# Altium PCB ISO-ASS[3]-VB-RC1.PcbDoc (part 3 of 3)
Units mm, origin at the board's own origin, x right, y up, seen from the top; angles counter-clockwise.
Board outline 300 x 85 mm, 4 copper layers (Top Layer, MidLayer1, MidLayer2, Bottom Layer); 157 components, 49 nets, 745 pads, 270 vias.
Unrouted connection lines stored in the file: 15.
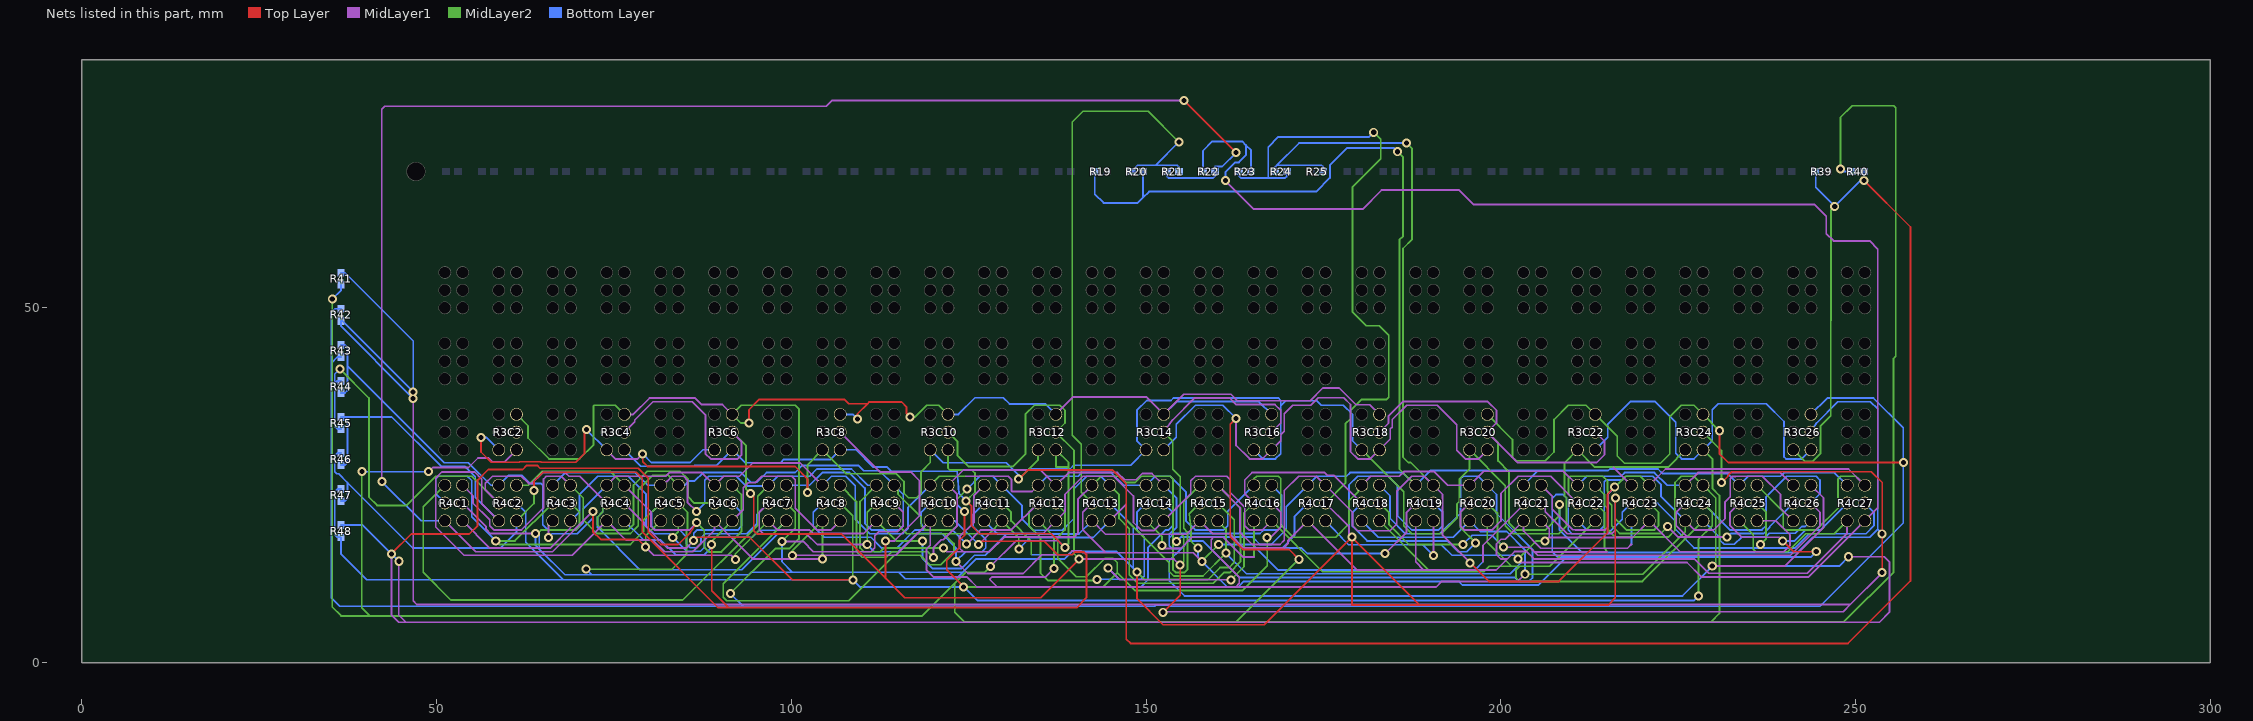
[diagram p5: the nets of this part, all layers, seen from the top]

## Via types
v1: diameter 1.27, hole 0.711, Top Layer to Bottom Layer, 270 vias

## Nets (pads, with @x,y where several pads share a name; then routed paths per layer and width w, separated by ;. In a path a pad name is that pad's centre, name@x,y a point inside that pad or via, vN(x,y) a via of type N, cw(c..) or ccw(c..) an arc to the next point about the centre after c; other vN are vias at no path point) (continued)
NetR3C2_3: R3C2.3 R3C4.3 R3C6.3 R3C8.3 R3C10.3 R3C12.3 R3C14.3 R3C16.3 R3C18.3 R3C20.3 R3C22.3 R3C24.3 R3C26.3 R39.1 R40.2 | length 556.8
  Top Layer w0.254: v1(56.286,31.752) 56.286,29.693 57.734,28.245 61.665,28.245 61.733,28.313 64.713,28.313 64.781,28.245 69.647,28.245 70.866,29.464 70.866,32.614 v1(71.145,32.893) ; v1(79.07,29.439) 79.07,28.346 79.756,27.661 100.533,27.661 102.311,25.883 v1(102.311,23.978) ; v1(132.055,25.883) 133.325,27.153 145.288,27.153 147.218,25.222 147.218,3.327 147.828,2.718 248.92,2.718 257.734,11.532 257.734,61.404 v1(251.167,67.97)
  MidLayer1 w0.254: R3C4.3@74,30 75.298,28.702 78.334,28.702 v1(79.07,29.439)
  MidLayer2 w0.254: v1(102.311,23.978) 102.311,27.911 R3C8.3@104.4,30 107.781,26.619 114.808,26.619 115.9,25.527 115.9,23.876 116.535,23.241 117.678,23.241 118.313,23.876 118.313,26.924 119.6,28.211 R3C10.3@119.6,30 ; v1(132.055,25.883) 134.8,28.628 R3C12.3@134.8,30 ; R3C18.3@180.4,30 186.334,24.066 186.334,19.304 187.452,18.186 191.618,18.186 193.811,20.38 193.811,22.368 194.158,22.714 194.158,25.87 195.6,27.312 R3C20.3@195.6,30 200.635,24.965 200.635,19.304 201.752,18.186 208.153,18.186 209.271,19.304 209.271,23.216 208.991,23.495 208.991,28.191 R3C22.3@210.8,30 213.225,27.575 223.575,27.575 R3C24.3@226,30 ; R3C26.3@241.2,30 242.803,28.397 243.97,28.397 245.037,29.464 245.037,33.325 246.503,34.791 246.503,48.182 246.507,48.186 246.507,63.766 v1(247.054,64.313)
  Bottom Layer w0.254: v1(56.286,31.752) 57.048,31.752 R3C2.3@58.8,30 ; v1(71.145,32.893) 71.145,32.855 R3C4.3@74,30 ; v1(79.07,29.439) 80.298,28.211 85.785,28.211 87.574,30 R3C6.3@89.2,30 ; R3C10.3@119.6,30 121.431,28.169 130.302,28.169 132.055,26.416 v1(132.055,25.883) 133.477,27.305 139.294,27.305 139.827,27.838 147.838,27.838 R3C14.3@150,30 148.717,31.283 148.717,35.56 150.114,36.957 153.518,36.957 153.873,37.313 168.625,37.313 168.981,36.957 168.981,36.223 ; R3C16.3@165.2,30 166.481,28.719 168.241,28.719 168.981,29.459 ; R3C18.3@180.4,30 179.095,31.305 179.095,35.001 177.8,36.297 174.684,36.297 174.066,36.914 169.672,36.914 168.981,36.223 ; R39.1@244.387,69.215 244.387,66.98 v1(247.054,64.313) 250.939,68.198 v1@251.167,68.426 ; v1(251.167,67.97) v1@251.167,68.426 ; 168.981,29.459 168.981,36.223 ; 168.981,29.459 168.981,36.223 ; v1@251.167,68.426 R40.2@251.167,69.215 v1@251.167,68.426
NetR3C2_4: R3C2.4 R3C4.4 R3C6.4 R3C8.4 R3C10.4 R3C12.4 R3C14.4 R3C16.4 R3C18.4 R3C20.4 R3C22.4 R3C24.4 R3C26.4 R42.1 R43.2 | length 690.2
  Top Layer w0.254: v1(94.056,33.782) 94.056,35.662 95.504,37.109 107.493,37.109 108.102,36.5 110.769,36.5 ; v1(109.322,34.366) 109.322,35.052 110.769,36.5 ; v1(116.738,34.62) 116.23,35.128 116.23,36.068 115.545,36.754 111.023,36.754 ; v1(230.81,32.69) 230.81,29.464 232.054,28.219 v1(256.718,28.219) ; 110.769,36.5 111.023,36.754 ; 110.769,36.5 111.023,36.754
  MidLayer1 w0.254: R3C4.4@76.5,35 77.738,35 80.035,37.297 86.462,37.297 87.386,36.373 90.327,36.373 R3C6.4@91.7,35 ; R3C12.4@137.3,35 139.765,37.465 150.035,37.465 R3C14.4@152.5,35 155.321,37.821 161.975,37.821 162.864,36.932 173.119,36.932 174.907,38.719 177.225,38.719 179.596,36.347 181.553,36.347 R3C18.4@182.9,35
  MidLayer2 w0.254: R3C2.4@61.3,35 62.916,33.384 62.916,31.673 65.869,28.719 70.172,28.719 72.161,30.709 72.161,36.195 72.263,36.297 75.203,36.297 R3C4.4@76.5,35 ; v1(91.44,9.754) 97.765,16.078 99.72,16.078 101.092,17.45 101.092,35.773 100.584,36.281 92.981,36.281 R3C6.4@91.7,35 92.918,33.782 v1(94.056,33.782) ; v1(116.738,34.62) 117.409,34.62 119.085,36.297 120.803,36.297 R3C10.4@122.1,35 ; R3C20.4@198.1,35 201.651,31.449 201.651,28.987 202.184,28.453 206.248,28.453 207.489,29.694 207.489,34.261 209.525,36.297 212.003,36.297 R3C22.4@213.3,35 216.408,31.892 216.408,29.134 217.424,28.118 222.504,28.118 223.799,29.413 223.799,34.64 225.44,36.281 227.219,36.281 R3C24.4@228.5,35 v1(230.81,32.69)
  Bottom Layer w0.254: R43.2@36.576,43.092 36.068,43.092 35.179,42.203 ; R42.1@36.576,49.872 35.775,49.872 35.179,49.276 35.179,42.203 ; v1(91.44,9.754) 93.243,7.95 ; R3C8.4@106.9,35 108.688,35 v1(109.322,34.366) ; R3C10.4@122.1,35 123.57,35 125.908,37.338 129.904,37.338 130.768,36.474 135.826,36.474 R3C12.4@137.3,35 ; R3C14.4@152.5,35 154.305,36.805 165.895,36.805 R3C16.4@167.7,35 ; R3C26.4@243.7,35 245.997,37.297 252.517,37.297 256.718,33.096 v1(256.718,28.219) 256.718,19.686 244.982,7.95 153.444,7.95 153.248,8.146 151.412,8.146 151.216,7.95 ; 35.179,9.144 35.179,42.203 ; 35.179,9.144 35.179,42.203 ; 35.179,9.144 36.373,7.95 93.243,7.95 ; 93.243,7.95 151.216,7.95 ; 93.243,7.95 151.216,7.95
NetR3C2_5: R3C2.5 R3C4.5 R3C6.5 R3C8.5 R3C10.5 R3C12.5 R3C14.5 R3C16.5 R3C18.5 R3C20.5 R3C22.5 R3C24.5 R3C26.5 R41.1 R42.2 | length 867.5
  Top Layer w0.254: v1(94.259,23.851) 94.717,23.393 94.717,18.618 95.174,18.161 107.036,18.161 113.309,11.887 ; v1(113.309,17.17) 113.309,11.887 ; v1(140.589,14.605) 135.153,9.169 116.027,9.169 ; v1(152.425,7.112) 154.813,9.5 v1(154.813,13.741) ; v1(231.089,25.375) 232.029,26.314 232.029,26.416 232.537,26.924 252.222,26.924 253.746,25.4 v1(253.746,18.173) ; 113.309,11.887 116.027,9.169 ; 113.309,11.887 116.027,9.169 ; v1(253.746,18.173) v1(253.746,12.7) v1(253.746,18.173)
  MidLayer1 w0.254: v1(46.736,38.176) v1(46.736,37.262) ; R3C4.5@76.5,32.5 77.953,33.953 77.953,34.21 80.532,36.789 86.088,36.789 87.919,34.959 87.919,29.464 88.664,28.719 92.456,28.719 92.981,29.244 92.981,31.219 R3C6.5@91.7,32.5 ; R3C8.5@106.9,32.5 112.501,26.899 116.84,26.899 118.085,25.654 118.085,20.701 114.554,17.17 v1(113.309,17.17) ; v1(140.589,14.605) 153.949,14.605 v1(154.813,13.741) ; v1(152.425,7.112) 152.502,7.188 248.234,7.188 249.25,8.204 ; R3C14.5@152.5,32.5 153.731,34.189 156.854,37.313 161.765,37.313 162.705,36.373 168.173,36.373 168.986,35.56 168.986,33.786 R3C16.5@167.7,32.5 ; R3C18.5@182.9,32.5 184.181,33.781 184.181,34.778 186.207,36.805 198.145,36.805 199.39,35.56 199.39,33.79 R3C20.5@198.1,32.5 202.405,28.195 213.481,28.195 214.605,29.319 214.605,31.195 R3C22.5@213.3,32.5 ; 46.736,8.712 v1(46.736,37.262) ; 46.736,8.712 47.244,8.204 249.25,8.204 ; 46.736,8.712 v1(46.736,37.262) ; 249.25,8.204 v1(253.746,12.7) 249.25,8.204
  MidLayer2 w0.254: R3C6.5@91.7,32.5 93.65,30.55 93.65,24.46 v1(94.259,23.851) ; R3C10.5@122.1,32.5 123.419,31.181 123.419,29.21 124.968,27.661 131.274,27.661 133.011,29.397 133.011,35.023 134.285,36.297 137.846,36.297 138.582,35.56 138.582,33.782 R3C12.5@137.3,32.5 139.852,29.948 139.852,15.342 v1(140.589,14.605) ; R3C14.5@152.5,32.5 153.781,31.219 153.781,27.254 154.813,26.222 154.813,18.237 155.321,17.729 155.321,14.249 v1(154.813,13.741) ; R3C20.5@198.1,32.5 199.619,30.981 199.619,28.448 201.143,26.924 201.143,19.736 202.184,18.694 206.248,18.694 208.255,20.701 v1(208.255,22.301) ; R3C24.5@228.5,32.5 231.089,29.911 v1(231.089,25.375)
  Bottom Layer w0.254: R41.1@36.576,54.952 37.123,54.952 46.736,45.339 v1(46.736,38.176) 36.74,48.172 R42.2@36.576,48.172 36.576,47.422 46.279,37.719 v1(46.736,37.262) ; v1(208.255,22.301) 208.255,18.746 211.482,15.519 241.783,15.519 243.942,17.678 251.982,17.678 253.111,18.808 ; R3C26.5@243.7,32.5 244.485,33.77 247.503,36.789 252.085,36.789 253.111,35.763 253.111,18.808 ; v1(253.746,18.173) 253.111,18.808
NetR3C2_6: R3C2.6 R3C4.6 R3C6.6 R3C8.6 R3C10.6 R3C12.6 R3C14.6 R3C16.6 R3C18.6 R3C20.6 R3C22.6 R3C24.6 R3C26.6 R40.1 R41.2 | length 957.6
  Top Layer w0.254: v1(124.663,22.809) 125.425,22.047 125.425,19.304 126.543,18.186 136.627,18.186 v1(138.582,16.231) ; v1(162.687,34.442) 161.874,33.63 161.874,17.729 163.627,15.977 170.155,15.977 v1(171.552,14.58)
  MidLayer1 w0.254: v1(48.895,26.924) 49.479,27.508 54.527,27.508 55.873,28.854 57.379,28.854 57.963,28.27 59.57,28.27 R3C2.6@61.3,30 ; v1(128.092,13.589) 131.698,17.195 137.618,17.195 v1(138.582,16.231) ; v1(162.687,34.442) 162.687,30.624 164.592,28.719 166.419,28.719 R3C16.6@167.7,30 168.986,31.286 168.986,32.106 169.494,32.614 169.494,35.103 170.688,36.297 173.203,36.297 174.249,37.343 177.864,37.343 178.816,36.391 178.816,29.735 179.832,28.719 181.619,28.719 R3C18.6@182.9,30 184.429,31.529 184.429,32.951 184.689,33.211 184.689,34.27 186.715,36.297 191.059,36.297 193.802,33.553 193.802,29.972 195.072,28.702 196.802,28.702 R3C20.6@198.1,30
  MidLayer2 w0.254: v1(35.331,51.257) 35.331,7.849 36.576,6.604 40.64,6.604 ; v1(39.497,26.924) 39.497,7.747 40.64,6.604 ; R3C10.6@122.1,30 122.1,27.432 122.379,27.153 125.476,27.153 125.908,26.721 125.908,24.054 v1(124.663,22.809) ; v1(128.092,13.589) 127.254,12.751 124.612,12.751 ; v1(138.582,16.231) 139.089,16.737 ; v1(171.552,14.58) 162.738,5.766 ; R3C24.6@228.5,30 229.845,28.655 229.845,24.536 230.81,23.571 230.81,6.934 229.641,5.766 ; v1(247.853,69.596) 247.853,76.835 249.504,78.486 255.397,78.486 255.651,78.232 255.651,43.18 255.346,42.875 255.346,12.776 248.336,5.766 229.641,5.766 ; 40.64,6.604 118.466,6.604 ; 40.64,6.604 118.466,6.604 ; 118.466,6.604 123.038,11.176 ; 123.038,11.176 123.038,7.112 124.384,5.766 ; 123.038,11.176 124.612,12.751 ; 123.038,11.176 124.612,12.751 ; 124.384,5.766 162.738,5.766 ; 124.384,5.766 162.738,5.766 ; 124.384,5.766 162.738,5.766 ; 139.089,16.737 139.089,27.571 ; 139.089,16.737 139.089,27.571 ; 139.089,27.571 137.3,27.571 R3C12.6@137.3,30 139.089,28.211 139.089,27.571 ; 162.738,5.766 229.641,5.766 ; 162.738,5.766 229.641,5.766
  Bottom Layer w0.254: v1(35.331,51.257) 36.576,52.502 R41.2@36.576,53.252 ; v1(39.497,26.924) v1(48.895,26.924) ; R3C4.6@76.5,30 78.814,27.686 86.276,27.686 86.395,27.805 89.505,27.805 R3C6.6@91.7,30 93.506,28.194 98.501,28.194 98.958,28.651 105.551,28.651 R3C8.6@106.9,30 109.13,30 111.565,27.566 113.523,27.566 114.114,26.975 123.393,26.975 123.667,23.805 v1(124.663,22.809) ; R3C14.6@152.5,30 154.254,31.754 154.254,33.579 156.972,36.297 160.833,36.297 v1(162.687,34.442) ; R3C22.6@213.3,30 215.062,31.762 215.062,33.63 218.237,36.805 221.767,36.805 224.663,33.909 224.663,29.525 225.469,28.719 227.219,28.719 R3C24.6@228.5,30 229.781,31.281 229.781,35.659 230.621,36.499 237.397,36.499 239.903,33.992 239.903,29.007 240.191,28.719 242.419,28.719 R3C26.6@243.7,30 ; v1(247.853,69.596) 248.234,69.215 R40.1@249.467,69.215
NetR4C1_1: R4C1.1 R4C3.1 R4C5.1 R4C7.1 R4C9.1 R4C11.1 R4C13.1 R4C15.1 R4C17.1 R4C19.1 R4C21.1 R4C23.1 R4C25.1 R4C27.1 R19.1 R20.1 | length 472.7
  MidLayer1 w0.254: R4C5.1@81.6,25 82.448,25.527 83.202,26.281 84.836,26.281 85.381,25.736 85.381,22.62 v1(86.665,21.336) ; v1(121.437,16.154) 121.945,15.646 124.221,15.646 ; R4C11.1@127.2,25 125.781,23.581 125.781,19.812 123.698,17.729 123.698,16.17 124.221,15.646 ; R4C13.1@142.4,25 140.411,23.011 140.411,18.237 139.877,17.703 129.996,17.703 127.94,15.646 ; 215.849,27.551 R4C23.1@218.4,25 ; 124.221,15.646 127.94,15.646 ; 124.221,15.646 127.94,15.646
  MidLayer2 w0.254: R4C1.1@51.2,25 48.158,21.958 48.158,12.725 52.045,8.839 84.734,8.839 95.275,19.38 95.275,23.475 R4C7.1@96.8,25 ; R4C9.1@112,25 109.703,22.703 109.703,16.18 110.236,15.646 112.551,15.646 113.059,16.154 v1(121.437,16.154) ; R4C13.1@142.4,25 143.689,26.289 146.355,26.289 147.244,25.4 148.463,25.4 149.352,26.289 153.416,26.289 153.797,25.908 153.797,17.094 153.797,16.586 ; v1(154.305,17.094) 153.797,16.586 ; R4C15.1@157.6,25 155.321,22.721 155.321,18.923 155.829,18.415 155.829,13.106 155.448,12.725 154.178,12.725 153.797,13.106 ; v1(185.471,72.009) 186.233,71.247 186.233,60.122 185.703,59.592 185.703,27.297 R4C19.1@188,25 ; 153.797,13.106 153.797,16.586 ; 153.797,13.106 153.797,16.586
  Bottom Layer w0.254: R4C3.1@66.4,25 68.189,26.789 78.003,26.789 79.792,25 R4C5.1@81.6,25 ; v1(86.665,21.336) 87.808,22.479 87.808,25.697 88.392,26.281 92.231,26.281 93.594,24.917 96.717,24.917 R4C7.1@96.8,25 98.081,26.281 102.616,26.281 103.632,27.297 108.499,27.297 110.796,25 R4C9.1@112,25 ; R19.1@142.787,69.215 142.787,66.026 144.02,64.794 148.829,64.794 ; R20.1@149.567,69.215 149.567,65.532 ; v1(154.305,17.094) 154.914,17.703 165.025,17.703 166.065,16.662 167.64,16.662 169.753,18.775 169.753,21.953 R4C17.1@172.8,25 174.089,26.289 178.257,26.289 178.765,26.797 186.203,26.797 R4C19.1@188,25 190.102,27.102 205.302,27.102 ; v1(185.471,72.009) 184.963,72.517 178.308,72.517 175.92,70.129 175.92,68.326 173.99,66.396 150.431,66.396 149.567,65.532 ; R4C21.1@203.2,25 205.302,27.102 ; 215.849,27.551 216.098,27.302 ; R4C27.1@248.8,25 247.011,26.789 239.911,26.789 239.411,26.289 234.889,26.289 R4C25.1@233.6,25 231.913,26.687 222.759,26.687 222.144,27.302 ; 148.829,64.794 149.567,65.532 ; 148.829,64.794 149.567,65.532 ; 205.302,27.102 215.138,27.102 ; 205.302,27.102 215.138,27.102 ; 215.138,27.102 215.338,27.302 216.098,27.302 ; 216.098,27.302 222.144,27.302 ; 216.098,27.302 222.144,27.302
NetR4C1_2: R4C1.2 R4C3.2 R4C5.2 R4C7.2 R4C9.2 R4C11.2 R4C13.2 R4C15.2 R4C17.2 R4C19.2 R4C21.2 R4C23.2 R4C25.2 R4C27.2 R20.2 R21.2 | length 574.1
  Top Layer w0.254: v1(239.725,17.17) 241.249,15.646 v1(244.45,15.646)
  MidLayer1 w0.254: R4C7.2@96.8,22.5 95.504,21.204 95.504,18.745 96.126,18.124 102.21,18.124 103.672,16.662 v1(110.719,16.662) ; v1(123.215,14.275) 124.917,12.573 132.69,12.573 135.331,15.215 139.04,15.215 139.573,15.748 140.847,15.748 141.097,15.498 144.319,15.498 ; R4C13.2@142.4,22.5 141.097,21.197 141.097,18.72 144.319,15.498 ; v1(157.861,14.275) 156.638,15.498 ; v1(183.693,15.392) 186.715,18.415 186.715,21.215 R4C19.2@188,22.5 ; 197.485,14.224 197.485,16.544 203.2,22.259 R4C21.2@203.2,22.5 ; R4C25.2@233.6,22.5 232.308,21.208 232.308,19.304 233.934,17.678 239.217,17.678 v1(239.725,17.17) ; 144.319,15.498 156.638,15.498 ; 144.319,15.498 156.638,15.498
  MidLayer2 w0.254: R4C3.2@66.4,22.5 61.07,17.17 v1(58.369,17.17) 58.877,16.662 77.343,16.662 79.172,18.491 79.172,20.072 R4C5.2@81.6,22.5 ; v1(110.719,16.662) 110.719,21.219 R4C9.2@112,22.5 ; R4C13.2@142.4,22.5 140.868,24.032 140.868,30.759 139.598,32.029 139.598,76.2 141.122,77.724 150.292,77.724 v1(154.635,73.381) ; v1(157.328,16.154) 156.337,17.145 156.337,18.872 156.083,20.983 R4C15.2@157.6,22.5 ; v1(157.861,14.275) v1(160.249,16.662)
  Bottom Layer w0.254: R4C1.2@51.2,22.5 49.911,23.789 49.911,25.908 50.292,26.289 54.371,26.289 54.981,25.679 54.981,20.559 v1(58.369,17.17) ; R4C5.2@81.6,22.5 80.315,21.215 80.315,19.304 80.924,18.694 84.328,18.694 85.242,17.78 85.242,16.764 85.801,16.205 86.716,16.205 87.274,16.764 87.274,17.577 87.884,18.186 93.726,18.186 95.148,19.609 95.148,20.848 R4C7.2@96.8,22.5 ; v1(110.719,16.662) 111.735,15.646 115.113,15.646 117.677,18.211 121.209,18.211 123.215,16.205 v1(123.215,14.275) 124.587,15.646 126.908,15.646 127.432,16.17 127.432,17.399 125.628,19.202 125.628,20.928 R4C11.2@127.2,22.5 ; R20.2@147.867,69.215 148.551,69.215 148.551,69.85 148.805,70.104 ; v1(154.635,73.381) 151.359,70.104 ; R21.2@154.647,69.215 154.647,69.85 154.393,70.104 151.359,70.104 ; v1(157.328,16.154) 157.328,14.808 v1(157.861,14.275) ; v1(160.249,16.662) 165.049,16.662 ; R4C17.2@172.8,22.5 170.942,20.642 170.942,17.932 169.164,16.154 ; v1(183.693,15.392) 172.72,15.392 171.958,16.154 169.164,16.154 ; 197.485,14.224 196.317,13.056 168.656,13.056 165.557,16.154 ; R4C23.2@218.4,22.5 217.119,21.219 217.119,20.218 215.087,18.186 210.033,18.186 209.499,18.72 209.499,22.987 208.788,23.698 207.772,23.698 207.239,23.165 207.239,15.646 208.001,14.884 209.194,14.884 ; v1(239.725,17.17) 241.402,17.17 242.926,18.694 244.994,18.694 R4C27.2@248.8,22.5 ; v1(244.45,15.646) 243.688,14.884 ; 148.805,70.104 151.359,70.104 ; 148.805,70.104 151.359,70.104 ; v1(157.861,14.275) 161.468,10.668 ; v1(157.861,14.275) 161.468,10.668 ; 161.468,10.668 162.988,10.668 163.776,11.455 194.096,11.455 194.604,10.947 205.257,10.947 209.194,14.884 ; 165.049,16.662 165.557,16.154 ; 165.049,16.662 165.557,16.154 ; 165.557,16.154 169.164,16.154 ; 165.557,16.154 169.164,16.154 ; 209.194,14.884 243.688,14.884 ; 209.194,14.884 243.688,14.884
NetR4C1_3: R4C1.3 R4C3.3 R4C5.3 R4C7.3 R4C9.3 R4C11.3 R4C13.3 R4C15.3 R4C17.3 R4C19.3 R4C21.3 R4C23.3 R4C25.3 R4C27.3 R21.1 R22.1 | length 530.9
  Top Layer w0.254: v1(72.06,21.336) 72.06,18.466 73.152,17.374 78.41,17.374 v1(79.502,16.281) ; v1(155.346,79.248) v1(162.712,71.882)
  MidLayer1 w0.254: v1(42.316,25.527) 42.316,77.978 42.748,78.41 104.927,78.41 105.766,79.248 v1(155.346,79.248) ; R4C1.3@51.2,20 55.554,15.646 66.37,15.646 v1(72.06,21.336) ; v1(65.786,17.678) 65.786,20 R4C3.3@66.4,20 ; v1(79.502,16.281) 80.645,15.138 91.542,15.138 v1(92.126,14.554) ; R4C7.3@96.8,20 98.106,18.694 102.611,18.694 103.094,18.211 110.211,18.211 R4C9.3@112,20 ; R4C13.3@142.4,20 144.29,18.11 155.71,18.11 R4C15.3@157.6,20 159.414,18.186 161.773,18.186 163.805,16.154 169.387,16.154 169.997,16.764 169.997,17.197 R4C17.3@172.8,20 179.744,13.056 189.168,13.056 ; R4C19.3@188,20 188,14.224 189.168,13.056 ; 218.4,16.673 217.856,16.129 205.641,16.129 203.2,18.57 R4C21.3@203.2,20 200.599,17.399 200.025,17.399 199.39,16.764 199.39,15.24 200.025,14.605 200.87,14.605 ; R4C27.3@248.8,20 248.8,18.219 243.18,12.598 229.286,12.598 227.254,14.63 204.673,14.63 203.638,15.665 201.93,15.665 ; 189.168,13.056 199.32,13.056 ; 189.168,13.056 199.32,13.056 ; 199.32,13.056 200.87,14.605 ; 200.87,14.605 201.93,15.665 ; 200.87,14.605 201.93,15.665
  MidLayer2 w0.254: v1(79.502,16.281) 79.502,17.902 R4C5.3@81.6,20 ; v1(92.126,14.554) 92.126,15.326 R4C7.3@96.8,20 ; R4C9.3@112,20 114.83,17.17 v1(118.491,17.17) ; R4C25.3@233.6,20 235.56,18.04 235.56,16.002 235.915,15.646 240.452,15.646 242.992,18.186 246.986,18.186 R4C27.3@248.8,20
  Bottom Layer w0.254: v1(42.316,25.527) 47.843,20 R4C1.3@51.2,20 ; v1(65.786,17.678) 66.294,18.186 69.883,18.186 72.06,20.364 v1(72.06,21.336) ; v1(118.491,17.17) 118.491,14.707 119.939,13.259 123.952,13.259 125.832,15.138 127.33,15.138 130.353,18.161 ; R4C11.3@127.2,20 129.039,18.161 130.353,18.161 ; R4C13.3@142.4,20 140.561,18.161 ; R21.1@152.947,69.215 152.947,68.566 153.187,68.326 159.473,68.326 159.727,68.58 R22.1@159.727,69.215 159.727,69.924 160.755,69.924 v1(162.712,71.882) ; 218.4,16.673 R4C23.3@218.4,20 ; 130.353,18.161 140.561,18.161 ; 130.353,18.161 140.561,18.161
NetR4C1_4: R4C1.4 R4C3.4 R4C5.4 R4C7.4 R4C9.4 R4C11.4 R4C13.4 R4C15.4 R4C17.4 R4C19.4 R4C21.4 R4C23.4 R4C25.4 R4C27.4 R24.2 R25.2 | length 469
  Top Layer w0.254: v1(195.682,14.072) 198.298,11.455 208.178,11.455 215.036,18.313 215.036,23.724 v1(216.052,24.74)
  MidLayer1 w0.254: R4C1.4@53.7,25 55.169,23.531 55.169,22.479 57.519,20.129 57.519,19.304 58.104,18.719 62.001,18.719 65.1,21.819 65.1,25.883 65.499,26.281 67.619,26.281 R4C3.4@68.9,25 ; R4C15.4@160.1,25 163.227,21.873 163.227,18.408 164.972,16.662 168.879,16.662 169.489,17.272 169.489,24.269 171.501,26.281 174.019,26.281 R4C17.4@175.3,25 179.095,21.205 179.095,19.304 179.807,18.593 184.379,18.593 185.331,19.545 185.331,24.16 187.452,26.281 189.219,26.281 R4C19.4@190.5,25 191.795,23.705 191.795,17.958 v1(195.682,14.072) ; R4C21.4@205.7,25 207.239,23.461 207.239,21.625 210.113,18.751 210.511,18.751 210.568,18.694 214.63,18.694 215.113,19.177 215.113,23.8 v1(216.052,24.74) ; R4C23.4@220.9,25 223.205,27.305 248.995,27.305 R4C27.4@251.3,25
  MidLayer2 w0.254: R4C3.4@68.9,25 70.689,23.211 70.689,20.124 72.602,18.211 77.353,18.211 78.446,19.304 78.446,24.362 80.5,26.416 82.684,26.416 R4C5.4@84.1,25 ; R4C9.4@114.5,25 115.037,25 115.037,23.775 118.319,20.493 118.319,19.272 118.872,18.719 122.796,18.719 123.381,19.304 123.381,23.076 v1(124.79,24.486) ; R4C13.4@144.9,25 146.202,23.698 146.202,20.32 147.65,18.872 147.65,12.395 148.844,11.201 159.449,11.201 160.956,12.709 161.78,12.709 163.297,14.225 163.297,21.803 R4C15.4@160.1,25 ; v1(186.715,73.228) 187.503,72.441 187.503,59.665 186.211,58.373 186.211,28.944 186.944,28.211 187.289,28.211 R4C19.4@190.5,25 ; v1(216.052,24.74) 217.594,26.281 219.619,26.281 R4C23.4@220.9,25 ; R4C25.4@236.1,25 239.801,21.299 239.801,18.974 240.056,18.719 244.475,18.719 247.519,21.763 247.519,25.908 247.892,26.281 250.019,26.281 R4C27.4@251.3,25
  Bottom Layer w0.254: R4C5.4@84.1,25 85.02,25 85.649,25.629 86.42,25.629 87.581,26.789 92.952,26.789 94.316,25.425 95.148,25.425 96.52,26.797 100.533,26.797 101.541,27.805 109.474,27.805 110.228,27.051 112.449,27.051 R4C9.4@114.5,25 115.799,23.701 115.799,19.304 115.189,18.694 111.344,18.694 110.388,19.65 110.388,24.605 108.204,26.789 104.375,26.789 102.586,25 R4C7.4@99.3,25 ; v1(124.79,24.486) 126.594,26.289 128.411,26.289 R4C11.4@129.7,25 132.512,22.188 132.512,20.269 134.112,18.669 138.201,18.669 139.852,20.32 139.852,24.511 141.622,26.281 143.619,26.281 R4C13.4@144.9,25 ; R24.2@168.187,69.215 168.187,69.85 ; R25.2@174.967,69.215 174.967,69.864 174.727,70.104 168.441,70.104 ; v1(186.715,73.228) 171.565,73.228 168.441,70.104 ; 168.187,69.85 168.441,70.104 ; 168.187,69.85 168.441,70.104
NetR4C1_5: R4C1.5 R4C3.5 R4C5.5 R4C7.5 R4C9.5 R4C11.5 R4C13.5 R4C15.5 R4C17.5 R4C19.5 R4C21.5 R4C23.5 R4C25.5 R4C27.5 R23.1 R24.1 | length 640.7
  Top Layer w0.254: v1(148.742,12.776) 148.742,9.017 152.4,5.359 166.675,5.359 v1(179.019,17.704) ; v1(216.129,23.216) 216.129,9.144 215.113,8.128 ; v1(179.019,17.704) 188.595,8.128 ; v1(179.019,17.704) 179.019,8.128 188.595,8.128 ; 188.595,8.128 215.113,8.128 ; 188.595,8.128 215.113,8.128
  MidLayer1 w0.254: R4C1.5@53.7,22.5 57.011,19.189 57.011,18.796 57.596,18.211 v1(63.983,18.211) ; v1(98.704,17.094) 101.676,17.094 103.124,15.646 111.252,15.646 111.785,16.18 111.785,17.889 112.362,18.466 114.96,18.466 115.799,19.304 115.799,21.201 R4C9.5@114.5,22.5 ; R4C17.5@175.3,22.5 178.587,19.213 178.587,18.136 v1(179.019,17.704) ; R4C21.5@205.7,22.5 206.248,21.952 206.248,21.264 209.339,18.172 215.607,18.172 216.129,18.694 v1(216.129,23.216)
  MidLayer2 w0.254: v1@64.505,18.451 64.749,18.694 69.596,18.694 70.181,19.279 70.181,21.219 R4C3.5@68.9,22.5 ; v1(71.12,13.183) 83.21,13.183 85.242,15.215 85.242,18.745 85.395,18.898 85.395,21.205 R4C5.5@84.1,22.5 ; v1(98.704,17.094) 100.584,18.974 100.584,21.216 R4C7.5@99.3,22.5 ; R4C11.5@129.7,22.5 130.988,21.212 130.988,19.99 133.833,17.145 133.833,15.215 ; v1(148.742,12.776) 149.809,11.709 158.732,11.709 160.448,13.425 161.73,13.425 162.437,14.132 162.437,20.163 R4C15.5@160.1,22.5 ; R4C17.5@175.3,22.5 178.103,25.303 178.103,33.653 178.841,34.392 178.841,35.56 180.391,37.109 183.921,37.109 184.201,37.389 184.201,46.177 182.88,47.498 181.026,47.498 179.119,49.405 179.119,67.054 183.083,71.018 183.083,73.762 v1(182.093,74.752) ; v1(216.129,23.216) 216.129,20.27 217.679,18.719 221.64,18.719 222.219,19.298 222.219,21.181 R4C23.5@220.9,22.5 ; R4C25.5@236.1,22.5 237.388,21.212 237.388,17.475 v1(236.576,16.662)
  Bottom Layer w0.254: v1(63.983,18.211) 63.983,16.535 64.505,16.013 ; v1@64.505,18.451 64.505,18.211 64.505,16.013 ; v1(71.12,13.183) 71.907,12.395 ; v1(98.704,17.094) 98.704,14.224 100.178,12.751 ; 133.833,15.215 139.09,15.215 ; R4C13.5@144.9,22.5 148.211,19.189 148.211,13.308 ; R23.1@163.107,69.215 163.107,68.58 163.361,68.326 167.234,68.326 ; R24.1@169.887,69.215 169.887,68.58 169.633,68.326 ; v1(179.019,17.704) 178.611,18.112 178.611,25.068 179.832,26.289 184.15,26.289 185.445,24.994 185.445,20.732 187.483,18.694 191.186,18.694 191.795,19.304 191.795,21.205 R4C19.5@190.5,22.5 ; v1(182.093,74.752) 181.432,74.092 168.656,74.092 167.234,72.669 167.234,68.326 ; R4C23.5@220.9,22.5 222.075,22.5 224.548,20.026 224.548,18.852 227.221,16.179 236.576,16.179 v1(236.576,16.662) 237.084,16.154 241.402,16.154 243.434,18.186 251.463,18.186 252.581,19.304 252.581,21.219 R4C27.5@251.3,22.5 ; 64.505,16.013 68.123,12.395 ; 64.505,16.013 68.123,12.395 ; 68.123,12.395 71.907,12.395 ; 71.907,12.395 94.005,12.395 ; 71.907,12.395 94.005,12.395 ; 94.005,12.395 94.361,12.751 100.178,12.751 ; 100.178,12.751 115.138,12.751 ; 100.178,12.751 115.138,12.751 ; 115.138,12.751 124.162,12.751 ; 115.138,12.751 124.162,12.751 ; 115.138,12.751 116.053,11.836 123.248,11.836 124.162,12.751 ; 124.162,12.751 126.017,14.605 ; 124.162,12.751 126.017,14.605 ; 126.017,14.605 138.481,14.605 139.09,15.215 ; 139.09,15.215 139.598,15.723 ; 139.09,15.215 139.598,15.723 ; 139.598,15.723 145.796,15.723 148.211,13.308 ; 148.211,13.308 v1(148.742,12.776) 148.211,13.308 ; 167.234,68.326 169.633,68.326 ; 167.234,68.326 169.633,68.326
NetR4C1_6: R4C1.6 R4C3.6 R4C5.6 R4C7.6 R4C9.6 R4C11.6 R4C13.6 R4C15.6 R4C17.6 R4C19.6 R4C21.6 R4C23.6 R4C25.6 R4C27.6 R22.2 R23.2 | length 548.8
  MidLayer1 w0.254: R4C1.6@53.7,20 57.546,16.154 66.04,16.154 68.9,19.014 R4C3.6@68.9,20 ; R4C13.6@144.9,20 147.218,22.318 ; v1(161.188,67.945) 165.202,63.932 180.518,63.932 183.185,66.599 194.132,66.599 196.164,64.567 244.221,64.567 245.872,62.916 245.872,60.452 246.888,59.436 251.968,59.436 253.111,58.293 253.111,21.811 R4C27.6@251.3,20 243.39,12.09 228.27,12.09 226.238,14.122 202.895,14.122 ; v1(190.5,15.138) R4C19.6@190.5,20 ; R4C21.6@205.7,20 206.832,18.868 206.832,17.755 206.731,17.653 ; R4C25.6@236.1,20 238.76,20 240.75,18.01 240.75,16.51 239.886,15.646 225.254,15.646 R4C23.6@220.9,20 218.553,17.653 206.731,17.653 ; 206.731,17.653 v1(206.223,17.145) 206.731,17.653
  MidLayer2 w0.254: v1(83.312,17.678) 84.1,18.466 R4C5.6@84.1,20 ; R4C7.6@99.3,20 90.424,11.124 90.424,9.246 90.932,8.738 108.128,8.738 114.529,15.138 118.186,15.138 119.507,13.818 121.082,13.818 122.936,15.672 122.936,16.789 121.539,18.186 ; R4C9.6@114.5,20 116.314,18.186 ; v1(132.08,16.027) 132.08,17.62 R4C11.6@129.7,20 127.886,18.186 121.539,18.186 ; 147.218,22.318 147.218,20.135 153.289,14.064 153.289,12.852 153.924,12.217 158.033,12.217 v1(161.265,15.449) 161.265,18.835 R4C15.6@160.1,20 ; v1(202.413,14.605) 204.953,17.145 v1(206.223,17.145) ; 116.314,18.186 121.539,18.186 ; 116.314,18.186 121.539,18.186
  Bottom Layer w0.254: R4C3.6@68.9,20 70.181,21.281 70.181,23.743 72.719,26.281 77.046,26.281 79.527,23.8 79.527,19.304 80.645,18.186 82.804,18.186 ; R4C7.6@99.3,20 97.969,18.669 95.504,18.669 94.513,17.678 88.138,17.678 87.782,17.323 87.782,16.256 87.224,15.697 85.293,15.697 v1(83.312,17.678) ; v1(132.08,16.027) 133.706,17.653 142.553,17.653 R4C13.6@144.9,20 ; R22.2@158.027,69.215 158.027,72.136 159.348,73.457 163.576,73.457 ; v1(161.188,67.945) 161.188,69.139 162.56,70.51 163.092,70.51 164.084,71.503 164.084,72.949 ; v1(161.265,15.449) 164.166,12.548 201.32,12.548 202.895,14.122 v1(202.413,14.605) ; R23.2@164.807,69.215 164.807,72.226 164.084,72.949 ; R4C17.6@175.3,20 178.144,17.018 178.539,16.623 ; v1(190.5,15.138) 189.015,16.623 ; 82.804,18.186 v1(83.312,17.678) ; 82.804,18.186 v1(83.312,17.678) ; 163.576,73.457 164.084,72.949 ; 163.576,73.457 164.084,72.949 ; 178.539,16.623 189.015,16.623 ; 178.539,16.623 189.015,16.623 ; 189.015,16.623 191.632,16.623 193.116,15.138 201.879,15.138 ; 201.879,15.138 v1(202.413,14.605) ; 201.879,15.138 v1(202.413,14.605)
NetR4C2_1: R4C2.1 R4C4.1 R4C6.1 R4C8.1 R4C10.1 R4C12.1 R4C14.1 R4C16.1 R4C18.1 R4C20.1 R4C22.1 R4C24.1 R4C26.1 R43.1 R44.2 | length 281.4
  MidLayer1 w0.254: R4C4.1@74,25 75.289,26.289 82.311,26.289 82.811,26.789 87.411,26.789 R4C6.1@89.2,25 90.489,26.289 92.717,26.289 94.571,28.143 101.257,28.143 R4C8.1@104.4,25 ; 124.638,26.289 130.607,26.289 131.039,25.857 131.039,24.227 131.136,24.13 133.93,24.13 R4C12.1@134.8,25 ; R4C18.1@180.4,25 181.689,26.289 185.711,26.289 186.363,26.941 190.601,26.941 192.543,25 R4C20.1@195.6,25 197.575,26.975 208.825,26.975 R4C22.1@210.8,25 ; R4C24.1@226,25 227.795,26.795 239.405,26.795 R4C26.1@241.2,25
  MidLayer2 w0.254: R4C10.1@119.6,25 120.889,26.289 124.638,26.289 ; R4C16.1@165.2,25 165.2,25.908 165.581,26.289 168.656,26.289 168.981,25.964 168.981,19.462 170.752,17.691 176.727,17.691 178.611,19.574 178.611,22.833 179.959,24.181 179.959,24.559 R4C18.1@180.4,25
  Bottom Layer w0.254: R44.2@36.576,38.012 37.123,38.012 37.465,38.354 37.465,41.829 ; R43.1@36.576,44.792 37.123,44.792 37.465,44.45 ; R4C4.1@74,25 70.689,21.689 70.689,19.711 69.697,18.719 65.711,18.719 64.999,19.431 64.999,24.983 64.708,25.273 63.163,25.273 62.02,26.416 60.216,26.416 R4C2.1@58.8,25 57.702,25 54.508,28.194 51.1,28.194 37.465,41.829 ; R4C8.1@104.4,25 105.681,26.281 107.704,26.281 109.017,24.968 109.017,20.244 111.075,18.186 115.697,18.186 116.481,18.97 116.481,21.881 R4C10.1@119.6,25 ; R4C12.1@134.8,25 136.089,26.289 140.431,26.289 140.931,26.789 145.067,26.789 146.856,25 R4C14.1@150,25 151.281,26.281 153.416,26.281 155.626,24.071 155.626,20.015 156.922,18.719 160.934,18.719 161.519,19.304 161.519,21.319 R4C16.1@165.2,25 ; R4C22.1@210.8,25 212.089,26.289 216.934,26.289 217.434,26.789 221.641,26.789 223.43,25 R4C24.1@226,25 ; 37.465,41.829 37.465,44.45 ; 37.465,41.829 37.465,44.45
NetR4C2_2: R4C2.2 R4C4.2 R4C6.2 R4C8.2 R4C10.2 R4C12.2 R4C14.2 R4C16.2 R4C18.2 R4C20.2 R4C22.2 R4C24.2 R4C26.2 R44.1 R45.2 | length 413.7
  MidLayer1 w0.254: R4C2.2@58.8,22.5 56.896,24.404 56.896,25.273 57.912,26.289 61.976,26.289 62.992,25.273 63.468,25.273 64.984,26.789 68.189,26.789 68.689,26.289 70.211,26.289 R4C4.2@74,22.5 ; v1(124.714,16.713) 126.72,18.719 131.019,18.719 R4C12.2@134.8,22.5 ; v1(144.678,13.335) 146.329,11.684 v1(161.976,11.684) ; R4C16.2@165.2,22.5 163.906,23.794 163.906,25.756 164.94,26.789 175.166,26.789 175.539,26.416 176.484,26.416 R4C18.2@180.4,22.5 ; R4C20.2@195.6,22.5 194.31,21.21 194.31,19.304 194.92,18.694 198.73,18.694 200.023,19.988 200.023,23.855 202.449,26.281 207.019,26.281 R4C22.2@210.8,22.5 ; v1(223.52,19.177) 224.993,17.704 226.314,17.704 ; R4C24.2@226,22.5 224.714,21.214 224.714,19.304 226.314,17.704 ; 226.314,17.704 v1(231.902,17.704) 226.314,17.704
  MidLayer2 w0.254: v1(36.398,41.402) 40.513,37.287 40.513,23.317 41.656,22.174 45.822,22.174 49.936,26.289 55.011,26.289 R4C2.2@58.8,22.5 ; R4C4.2@74,22.5 73.457,22.5 73.457,21.268 72.719,20.531 72.719,19.406 73.406,18.719 77.031,18.719 77.8,19.489 77.8,25.044 79.731,26.975 84.328,26.975 85.471,25.832 85.471,23.368 86.339,22.5 R4C6.2@89.2,22.5 ; R4C12.2@134.8,22.5 133.502,21.202 133.502,19.304 135.128,17.678 135.128,12.624 136.144,11.608 142.951,11.608 v1(143.104,11.76) ; v1(161.976,11.684) 163.805,13.513 163.805,21.105 R4C16.2@165.2,22.5 ; R4C20.2@195.6,22.5 194.319,21.219 194.319,19.016 v1(196.444,16.891) ; R4C22.2@210.8,22.5 209.519,23.781 209.519,25.996 209.804,26.281 214.376,26.281 215.036,25.621 215.036,24.181 215.113,24.105 215.113,22.708 215.621,22.2 215.621,19.329 216.739,18.211 222.554,18.211 v1(223.52,19.177)
  Bottom Layer w0.254: v1(36.398,41.402) 35.687,40.691 35.687,39.37 ; R45.2@36.576,32.932 36.029,32.932 35.687,33.274 ; R44.1@36.576,39.712 36.029,39.712 35.687,39.37 ; R4C4.2@74,22.5 73.457,22.5 73.457,21.268 72.719,20.531 72.719,19.077 78.689,13.106 93.015,13.106 98.019,18.11 104.241,18.11 ; R4C8.2@104.4,22.5 103.119,21.219 103.119,19.232 104.241,18.11 ; R4C10.2@119.6,22.5 118.313,21.213 118.313,19.583 118.872,18.719 ; v1(124.714,16.713) 122.708,18.719 ; v1(143.104,11.76) 146.253,11.76 ; v1(144.678,13.335) 146.253,11.76 ; R4C14.2@150,22.5 148.719,21.219 148.719,18.72 149.758,17.68 149.758,12.167 149.352,11.76 ; R4C18.2@180.4,22.5 179.119,21.219 179.119,19.204 181.153,17.17 192.456,17.17 193.98,15.646 195.199,15.646 v1(196.444,16.891) ; v1(231.902,17.704) 232.409,18.211 237.032,18.211 237.896,19.075 237.896,19.196 R4C26.2@241.2,22.5 ; 35.687,33.274 35.687,39.37 ; 35.687,33.274 35.687,39.37 ; 104.241,18.11 104.673,17.678 ; 104.241,18.11 104.673,17.678 ; 104.673,17.678 111.252,17.678 112.776,16.154 114.884,16.154 117.449,18.719 118.872,18.719 ; 118.872,18.719 122.708,18.719 ; 118.872,18.719 122.708,18.719 ; 146.253,11.76 149.352,11.76 ; 146.253,11.76 149.352,11.76
NetR4C2_3: R4C2.3 R4C4.3 R4C6.3 R4C8.3 R4C10.3 R4C12.3 R4C14.3 R4C16.3 R4C18.3 R4C20.3 R4C22.3 R4C24.3 R4C26.3 R45.1 R46.2 | length 448.9
  MidLayer1 w0.254: R4C2.3@58.8,20 56.388,22.412 56.388,25.883 55.372,26.899 50.8,26.899 49.911,26.01 49.911,19.126 53.899,15.138 69.138,15.138 R4C4.3@74,20 76.701,17.299 80.507,17.299 82.159,15.646 86.157,15.646 89.2,18.69 R4C6.3@89.2,20 94.57,14.63 100.152,14.63 v1(104.4,14.63) ; v1(100.152,15.138) 104.4,15.138 114.738,15.138 R4C10.3@119.6,20 119.6,16.578 119.05,16.027 119.05,13.106 120.091,12.065 124.79,12.065 126.187,10.668 ; v1(137.033,13.31) 135.788,12.065 128.27,12.065 128.016,11.811 128.016,11.684 129.032,10.668 ; v1(152.273,16.535) 152.73,16.078 154.864,16.078 156.464,17.678 159.512,17.678 ; 165.2,14.908 163.628,14.908 160.858,17.678 ; v1(203.429,12.471) 202.413,11.455 191.668,11.455 190.881,10.668 162.633,10.668 ; R4C24.3@226,20 227.306,18.694 229.972,18.694 231.597,20.32 231.597,22.657 232.319,23.379 232.319,25.936 232.64,26.257 233.097,26.257 233.121,26.281 236.863,26.281 239.411,23.733 239.411,21.789 R4C26.3@241.2,20 ; 126.187,10.668 129.032,10.668 ; 126.187,10.668 129.032,10.668 ; 129.032,10.668 162.633,10.668 ; 129.032,10.668 162.633,10.668 ; 159.512,17.678 160.858,17.678 ; 159.512,17.678 159.185,17.352 159.185,15.995 163.141,12.04 163.141,11.176 162.633,10.668 ; 159.512,17.678 160.858,17.678
  MidLayer2 w0.254: v1(100.152,15.138) 100.152,15.752 R4C8.3@104.4,20 v1(104.4,14.63) ; R4C12.3@134.8,20 137.033,17.767 v1(137.033,13.31) ; R4C14.3@150,20 152.273,17.727 v1(152.273,16.535) ; 165.2,14.908 R4C16.3@165.2,20 ; v1(203.429,12.471) 220.007,12.471 226,18.464 R4C24.3@226,20
  Bottom Layer w0.254: R46.2@36.576,27.852 37.123,27.852 37.465,28.194 37.465,34.29 37.123,34.632 ; R4C2.3@58.8,20 55.489,23.311 55.489,26.197 54,27.686 50.673,27.686 43.727,34.632 37.123,34.632 ; R4C18.3@180.4,20 182.722,17.678 193.278,17.678 R4C20.3@195.6,20 197.109,18.491 200.812,18.491 203.429,15.875 v1(203.429,12.471) ; R4C22.3@210.8,20 212.081,18.719 213.996,18.719 214.581,19.304 214.581,25.496 214.851,25.766 217.129,25.766 217.645,26.281 221.431,26.281 222.555,25.157 222.555,23.445 R4C24.3@226,20 ; 37.123,34.632 R45.1@36.576,34.632 37.123,34.632
NetR4C2_4: R4C2.4 R4C4.4 R4C6.4 R4C8.4 R4C10.4 R4C12.4 R4C14.4 R4C16.4 R4C18.4 R4C20.4 R4C22.4 R4C24.4 R4C26.4 R48.1 | length 942.7
  Top Layer w0.254: v1(43.663,15.342) 46.457,18.136 54.635,18.136 55.804,19.304 55.804,25.73 57.302,27.229 62.179,27.229 62.755,27.805 64.211,27.805 64.61,27.407 78.435,27.407 79.858,25.984 79.858,18.466 81.661,16.662 84.074,16.662 85.75,18.339 v1(86.69,19.761)
  MidLayer1 w0.254: v1(43.663,15.342) 43.663,6.756 44.704,5.715 45.72,5.715 ; v1(44.704,14.3) 44.704,6.731 45.72,5.715 ; R4C4.4@76.5,25 80.264,21.236 80.264,19.202 80.772,18.694 85.623,18.694 v1(86.69,19.761) ; v1(120.066,14.834) 120.066,16.256 121.133,17.323 121.4,17.323 123.381,19.304 123.381,23.719 R4C10.4@122.1,25 124.278,27.178 135.122,27.178 R4C12.4@137.3,25 139.089,26.789 145.982,26.789 146.99,25.781 148.59,25.781 149.479,26.67 150.83,26.67 R4C14.4@152.5,25 ; v1(229.794,13.614) 240.01,13.614 245.489,19.094 245.489,23.211 R4C26.4@243.7,25 ; v1(248.996,14.935) 254.051,14.935 254.762,14.224 254.762,7.112 253.365,5.715 ; 45.72,5.715 253.365,5.715 ; 45.72,5.715 253.365,5.715
  MidLayer2 w0.254: R4C2.4@61.3,25 62.948,25 64.934,26.986 74.514,26.986 R4C4.4@76.5,25 ; v1(86.69,19.761) 87.757,18.694 87.757,16.256 88.392,15.621 90.163,15.621 92.989,18.447 92.989,23.711 R4C6.4@91.7,25 ; R4C8.4@106.9,25 109.195,22.705 109.195,15.672 110.007,14.859 113.393,14.859 114.18,15.646 119.253,15.646 v1(120.066,14.834) ; R4C22.4@213.3,25 214.605,23.695 214.605,22.2 215.113,21.692 215.113,18.72 216.129,17.703 223.588,17.703 224.548,18.663 224.548,25.4 225.437,26.289 227.211,26.289 R4C24.4@228.5,25 230.289,23.211 230.289,14.11 v1(229.794,13.614)
  Bottom Layer w0.254: R48.1@36.576,19.392 39.612,19.392 v1(43.663,15.342) v1(44.704,14.3) ; R4C14.4@152.5,25 154.305,23.195 154.305,19.11 153.289,18.094 153.289,17.576 ; R4C16.4@167.7,25 169.113,23.587 169.113,19.304 168.528,18.719 166.568,18.719 166.06,18.211 153.924,18.211 153.289,17.576 ; R4C18.4@182.9,25 184.404,23.496 184.404,20.32 186.538,18.186 191.414,18.186 194.319,21.091 194.319,25.908 194.692,26.281 196.819,26.281 R4C20.4@198.1,25 199.39,23.71 199.39,21.031 204.445,15.977 204.445,11.938 203.962,11.455 202.514,11.455 201.955,12.014 163.144,12.014 157.988,17.17 156.058,17.17 ; v1(248.996,14.935) 247.675,13.614 v1(229.794,13.614) 225.598,9.418 155.428,9.418 153.289,11.557 153.289,14.402 154.965,16.078 ; 153.289,16.459 153.289,17.576 ; 153.289,16.459 153.67,16.078 154.965,16.078 ; 153.289,16.459 153.289,17.576 ; 154.965,16.078 156.058,17.17 ; 154.965,16.078 156.058,17.17
NetR4C2_5: R4C2.5 R4C4.5 R4C6.5 R4C8.5 R4C10.5 R4C12.5 R4C14.5 R4C16.5 R4C18.5 R4C20.5 R4C22.5 R4C24.5 R4C26.5 R47.1 R48.2 | length 593.6
  Top Layer w0.254: v1(86.258,17.221) 86.716,17.678 94.131,17.678 100.125,11.684 v1(108.687,11.684) ; v1(124.308,10.693) 121.92,13.081 121.92,14.431 123.698,16.209 123.698,17.221 124.409,17.932 v1(124.409,21.285)
  MidLayer1 w0.254: R4C4.5@76.5,22.5 79.248,19.752 79.248,19.482 82.575,16.154 85.192,16.154 v1(86.258,17.221) ; v1(167.081,17.678) 167.589,17.678 168.981,19.07 168.981,21.219 R4C16.5@167.7,22.5 ; v1(200.406,16.281) 204.038,16.281 ; 214.96,15.621 204.699,15.621 ; R4C26.5@243.7,22.5 244.981,21.219 244.981,19.304 240.815,15.138 205.181,15.138 204.699,15.621 ; 204.038,16.281 204.699,15.621 ; 204.038,16.281 204.699,15.621
  MidLayer2 w0.254: R4C8.5@106.9,22.5 108.687,20.713 v1(108.687,11.684) ; v1(124.308,10.693) 143.967,10.693 145.948,12.675 ; R4C12.5@137.3,22.5 138.581,21.219 138.581,18.72 137.566,17.705 137.566,14.707 140.157,12.116 141.605,12.116 144.221,14.732 145.339,14.732 145.948,14.122 145.948,12.675 ; v1(167.081,17.678) 167.081,13.652 163.615,10.185 148.438,10.185 145.948,12.675 ; R4C18.5@182.9,22.5 184.258,21.142 184.258,19.45 187.046,16.662 v1(194.64,16.662) ; R4C20.5@198.1,22.5 199.517,21.083 199.517,17.17 v1(200.406,16.281) ; R4C22.5@213.3,22.5 214.605,21.195 214.605,16.281 214.96,15.621 ; v1(227.838,9.398) 227.838,17.361 229.781,19.304 229.781,21.219 R4C24.5@228.5,22.5
  Bottom Layer w0.254: R47.1@36.576,24.472 36.029,24.472 35.687,24.13 35.687,18.034 36.029,17.692 R48.2@36.576,17.692 36.576,15.291 40.183,11.684 67.869,11.684 ; R4C2.5@61.3,22.5 62.586,21.214 62.586,16.967 67.869,11.684 ; v1(86.258,17.221) 86.258,18.237 86.716,18.694 92.456,18.694 92.981,19.219 92.981,21.219 R4C6.5@91.7,22.5 ; R4C10.5@122.1,22.5 123.194,22.5 v1(124.409,21.285) ; R4C14.5@152.5,22.5 153.781,21.219 153.781,19.304 153.197,18.72 152.781,18.72 150.266,16.205 150.266,11.659 149.301,10.693 v1(124.308,10.693) ; v1(194.64,16.662) 195.949,17.971 198.716,17.971 v1(200.406,16.281) ; v1(227.838,9.398) 227.228,8.788 126.213,8.788 v1(124.308,10.693) ; R4C24.5@228.5,22.5 232.281,18.719 236.796,18.719 237.381,19.304 237.381,23.378 240.284,26.281 244.432,26.281 244.983,25.73 244.983,23.783 R4C26.5@243.7,22.5 ; 67.869,11.684 v1(108.687,11.684) ; 67.869,11.684 v1(108.687,11.684) ; v1(108.687,11.684) 109.677,10.693 v1(124.308,10.693)
NetR4C2_6: R4C2.6 R4C4.6 R4C6.6 R4C8.6 R4C10.6 R4C12.6 R4C14.6 R4C16.6 R4C18.6 R4C20.6 R4C22.6 R4C24.6 R4C26.6 R46.1 R47.2 | length 470.6
  Top Layer w0.254: v1(63.754,24.257) 63.754,25.578 65.024,26.848 78.181,26.848 79.019,26.01 79.019,18.44 89.687,7.772 91.186,7.772 ; v1(88.798,16.662) 88.798,10.16 91.186,7.772 ; v1(126.416,16.662) 126.873,17.12 135.636,17.12 137.541,15.215 139.598,15.215 140.005,15.621 141.224,15.621 141.605,15.24 141.605,9.144 140.233,7.772 ; 91.186,7.772 140.233,7.772 ; 91.186,7.772 140.233,7.772
  MidLayer1 w0.254: R4C6.6@91.7,20 93.243,21.543 93.243,24.638 93.98,25.375 94.949,25.375 95.864,26.289 100.076,26.289 100.584,25.781 100.584,21.767 103.632,18.719 105.619,18.719 R4C8.6@106.9,20 ; v1(126.416,16.662) 127.964,18.211 135.511,18.211 R4C12.6@137.3,20 138.582,21.282 138.582,23.741 141.122,26.281 145.431,26.281 148.234,23.477 148.234,19.761 149.352,18.644 151.144,18.644 R4C14.6@152.5,20 156.312,23.812 156.312,25.629 156.972,26.289 161.392,26.289 161.874,25.806 161.874,23.984 163.919,21.939 163.919,19.304 164.504,18.719 166.419,18.719 R4C16.6@167.7,20
  MidLayer2 w0.254: R4C2.6@61.3,20 63.754,22.454 v1(63.754,24.257) ; v1(88.798,16.662) 88.798,17.098 R4C6.6@91.7,20 ; R4C16.6@167.7,20 174.873,12.827 190.073,12.827 ; R4C18.6@182.9,20 190.073,12.827 ; R4C20.6@198.1,20 198.1,16.993 201.504,13.589 ; R4C22.6@213.3,20 206.889,13.589 ; R4C24.6@228.5,20 219.955,11.455 202.692,11.455 202.133,12.014 202.133,13.03 202.692,13.589 ; 190.073,12.827 197.612,12.827 ; 190.073,12.827 197.612,12.827 ; 197.612,12.827 198.374,13.589 201.504,13.589 ; 201.504,13.589 202.692,13.589 ; 201.504,13.589 202.692,13.589 ; 202.692,13.589 206.889,13.589 ; 202.692,13.589 206.889,13.589 ; 202.692,13.589 206.889,13.589
  Bottom Layer w0.254: R47.2@36.576,22.772 37.123,22.772 37.465,23.114 37.465,25.4 ; R46.1@36.576,29.552 36.029,29.552 35.687,29.21 35.687,26.924 35.966,26.645 36.22,26.645 ; R4C2.6@61.3,20 61.3,18.453 59.001,16.154 46.711,16.154 37.465,25.4 ; R4C4.6@76.5,20 79.201,17.299 81.609,17.299 83.718,15.189 87.732,15.189 88.798,16.256 v1(88.798,16.662) ; R4C10.6@122.1,20 123.078,20 v1(126.416,16.662) ; R4C24.6@228.5,20 230.886,17.614 230.886,17.272 231.471,16.687 232.918,16.687 233.934,17.703 237.266,17.703 237.812,18.249 241.465,18.249 242.418,19.202 242.902,19.202 R4C26.6@243.7,20 ; 36.22,26.645 37.465,25.4 ; 36.22,26.645 37.465,25.4